# Altium PCB Smart_Ruler_PCB.PcbDoc
Units mil, origin at the board's own origin, x right, y up, seen from the top; angles counter-clockwise.
Board outline 6135.02 x 984.25 mil, 2 copper layers (Top Layer, Bottom Layer); 17 components, 24 nets, 192 pads, 0 vias.
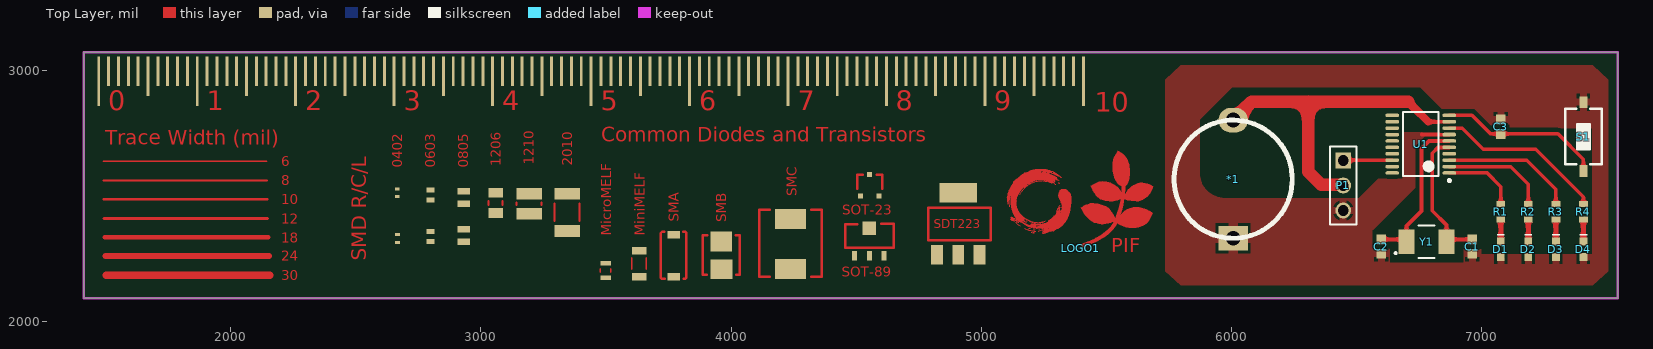
[diagram p0: Top Layer view]
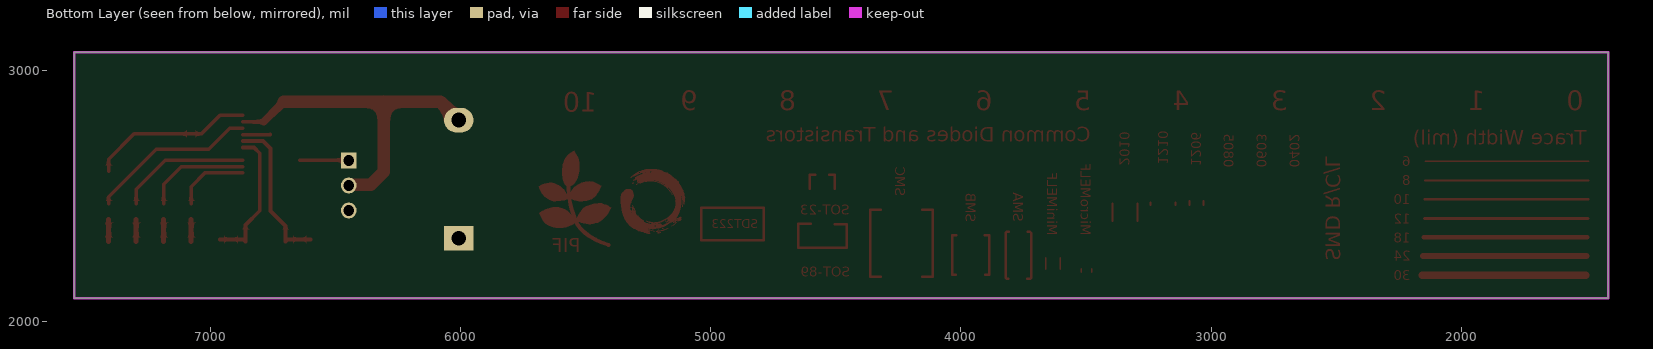
[diagram p1: Bottom Layer view, seen from below]
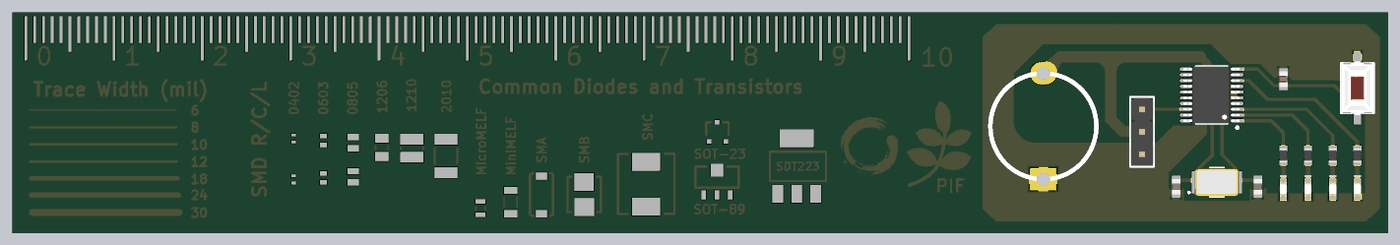
[diagram p2: 3D render of the assembled board from above, using the file's embedded part models]

## Layer stack, top to bottom
Top Solder: solder mask 0.4, Solder Resist, Dk 3.5
Top Layer: signal copper 1.4
Dielectric 1: dielectric 12.6, FR-4, Dk 4.8
Bottom Layer: signal copper 1.4
Bottom Solder: solder mask 0.4, Solder Resist, Dk 3.5

## Board outline
1410.98,2090.75 1410.98,3075 7546,3075 7546,2090.75

## Design rules (kind name [scope] priority, off if disabled: settings)
Clearance [All] p1: gap=10 ignorepadtopadclearanceinfootprint=FALSE
PolygonConnect PolygonConnect_6 [All vs IsNamedPolygon('GND_L01_P000')] p1: thpad.connectstyle=Relief thpad.reliefconductorwidth=30 thpad.reliefentries=4 thpad.polygonreliefangle="90 Angle" thpad.airgapwidth=10 smdpad.connectstyle=Relief smdpad.reliefconductorwidth=30 smdpad.reliefentries=4 smdpad.polygonreliefangle="90 Angle" smdpad.airgapwidth=10 via.connectstyle=Relief via.reliefconductorwidth=10 via.reliefentries=4 via.polygonreliefangle="90 Angle" via.airgapwidth=10
PolygonConnect PolygonConnect_5 [All vs IsNamedPolygon('NONET_L01_P000')] p2: thpad.connectstyle=Relief thpad.reliefconductorwidth=25 thpad.reliefentries=4 thpad.polygonreliefangle="90 Angle" thpad.airgapwidth=10 smdpad.connectstyle=Relief smdpad.reliefconductorwidth=25 smdpad.reliefentries=4 smdpad.polygonreliefangle="90 Angle" smdpad.airgapwidth=10 via.connectstyle=Relief via.reliefconductorwidth=10 via.reliefentries=4 via.polygonreliefangle="90 Angle" via.airgapwidth=10
PolygonConnect PolygonConnect_4 [All vs IsNamedPolygon('NONET_L01_P000')] p3: thpad.connectstyle=Relief thpad.reliefconductorwidth=25 thpad.reliefentries=4 thpad.polygonreliefangle="90 Angle" thpad.airgapwidth=10 smdpad.connectstyle=Relief smdpad.reliefconductorwidth=25 smdpad.reliefentries=4 smdpad.polygonreliefangle="90 Angle" smdpad.airgapwidth=10 via.connectstyle=Relief via.reliefconductorwidth=10 via.reliefentries=4 via.polygonreliefangle="90 Angle" via.airgapwidth=10
PolygonConnect PolygonConnect_3 [All vs IsNamedPolygon('NONET_L01_P000')] p4: thpad.connectstyle=Relief thpad.reliefconductorwidth=20 thpad.reliefentries=4 thpad.polygonreliefangle="90 Angle" thpad.airgapwidth=10 smdpad.connectstyle=Relief smdpad.reliefconductorwidth=20 smdpad.reliefentries=4 smdpad.polygonreliefangle="90 Angle" smdpad.airgapwidth=10 via.connectstyle=Relief via.reliefconductorwidth=10 via.reliefentries=4 via.polygonreliefangle="90 Angle" via.airgapwidth=10
PolygonConnect PolygonConnect_2 [All vs IsNamedPolygon('NONET_L01_P000')] p5: thpad.connectstyle=Relief thpad.reliefconductorwidth=30 thpad.reliefentries=4 thpad.polygonreliefangle="90 Angle" thpad.airgapwidth=10 smdpad.connectstyle=Relief smdpad.reliefconductorwidth=30 smdpad.reliefentries=4 smdpad.polygonreliefangle="90 Angle" smdpad.airgapwidth=10 via.connectstyle=Relief via.reliefconductorwidth=10 via.reliefentries=4 via.polygonreliefangle="90 Angle" via.airgapwidth=10
PolygonConnect PolygonConnect_1 [All vs IsNamedPolygon('NONET_L01_P000')] p6: thpad.connectstyle=Relief thpad.reliefconductorwidth=30 thpad.reliefentries=4 thpad.polygonreliefangle="90 Angle" thpad.airgapwidth=10 smdpad.connectstyle=Relief smdpad.reliefconductorwidth=10 smdpad.reliefentries=4 smdpad.polygonreliefangle="90 Angle" smdpad.airgapwidth=10 via.connectstyle=Relief via.reliefconductorwidth=10 via.reliefentries=4 via.polygonreliefangle="90 Angle" via.airgapwidth=10
PolygonConnect [All] p7: connectstyle=Relief reliefconductorwidth=10 reliefentries=4 polygonreliefangle="90 Angle" airgapwidth=10
RoutingVias [All] p1: holewidth=28 width=50 viastyle="Through Hole" minholewidth=28 minwidth=50 maxholewidth=28 maxwidth=50
SolderMaskExpansion [All] p1: expansion=4 istentingtop=FALSE
Width [All] p1: maxlimit=50 minlimit=10 preferedwidth=20 minimp=50.000000 maximp=50.000000 favimp=50.000000
30 further rules are at their usual default settings.

## Components (designator, comment, footprint, x,y, rotation, side; value= is the part's Value field where it differs from the comment)
*1 "CR1220_Bat Battery" "CR1220_Bat Battery" 6008,2567 r180 top
C1 "20pF" CAPC17595_87N_KEM_0603 6964,2297.65 r90 top
C2 "20pF" CAPC17595_87N_KEM_0603 6600,2297.65 r90 top
C3 "22pF" CAPC17595_87N_KEM_0603 7078,2777 r90 top
D1 "Color ? , 3.2V, 140°" WL-SMCW_0603_150060xx75003 7078,2287 r270 top
D2 "Color ? , 3.2V, 140°" WL-SMCW_0603_150060xx75003 7188,2287 r270 top
D3 "Color ? , 3.2V, 140°" WL-SMCW_0603_150060xx75003 7298,2287 r270 top
D4 "Color ? , 3.2V, 140°" WL-SMCW_0603_150060xx75003 7408,2287 r270 top
LOGO1 "LOGO PIF" "PIF LOGO BIG TOP" 5399,2291 r0 top
P1 "61300311121" 61300311121 6448,2542 r270 top
R1 "100Ω" "WRIS-PSMB_0603_L1.6W0.8H0.3 - duplicate" 7078,2437 r270 top
R2 "100Ω" "WRIS-PSMB_0603_L1.6W0.8H0.3 - duplicate" 7188,2437 r270 top
R3 "100Ω" "WRIS-PSMB_0603_L1.6W0.8H0.3 - duplicate" 7298,2437 r270 top
R4 "100Ω" "WRIS-PSMB_0603_L1.6W0.8H0.3 - duplicate" 7408,2437 r270 top
S1 "Tact SW - 2Pin" SW-SMD 7408,2737 r90 top
U1 "CH32V003F4P6" TSOP20_CH32V003 6758,2707 r180 top
Y1 "24MHz" WE-XTAL_CFPX-5032_2Pin 6781,2317 r0 top

## Footprints (in the part's own frame and the unit in brackets; to place one, negate y for a bottom-side part, rotate by r counter-clockwise, add the part's x,y. Pads: shape width x height; smd on the part's side, far side on the other; paste and mask are expansions set on the pad)
61300311121 [mm] "Pin Header, pitch 2.54 mm, THT, Vertical, single row, 3p"
  rect 1.6x1.6 hole 1.1: 1(-2.54,0)
  round 1.6 hole 1.1: 2(0,0) 3(2.54,0)
  silkscreen extent -3.96,-1.35 3.96,1.35, body extent -3.81,-1.27 3.81,1.27, height 8.57
CAPC17595_87N_KEM_0603 [mm]
  rect 1.006x0.95 smd paste+0 mask+0: 1(-0.728,0) 2(0.728,0)
  body extent -0.87,-0.48 0.87,0.48, height 0.87
"CR1220_Bat Battery" [mm]
  rect 3x2.5 hole 1.5: 1(0,6)
  oval 3x2.5 hole 1.5: 2(0,-6)
  silkscreen extent -6,-6 6,6
"PIF LOGO BIG TOP" [mil]
  Top Layer region: 103.01,266.37 103.07,266.34 103.14,266.35 112.3,263.85 112.31,263.84 112.33,263.84 118.99,261.74 119.04,261.71 119.1,261.7 126.2,257.97 126.27,257.89 132.43,254.63 132.45,254.61 132.48,254.6 144.58,246.67 144.65,246.58 144.74,246.53 156.41,231.53 156.42,231.49 156.45,231.47 164.35,218.57 164.35,218.56 164.35,218.56 166.85,214.4 166.88,214.18 166.93,213.97 164.87,200.2 164.83,200.15 164.84,200.08 164.74,199.98 164.69,199.85 164.64,199.83 164.61,199.78 164.55,199.77 164.51,199.72 147.84,191.82 147.77,191.82 147.71,191.77 128.94,187.61 128.88,187.62 128.82,187.59 114.25,187.16 114.2,187.18 114.14,187.17 96.64,189.67 96.6,189.69 96.55,189.69 85.29,193.02 85.26,193.04 85.22,193.04 78.15,195.98 78.1,196.03 78.02,196.05 73.02,199.79 73.01,199.79 73,199.8 65.07,206.06 65.05,206.11 65,206.13 58.77,212.8 58.74,212.87 58.68,212.91 48.25,230.81 48.24,230.84 48.22,230.86 43.22,241.29 43.22,241.31 43.21,241.32 40.31,248.39 40.31,248.58 40.27,248.76 40.31,248.82 40.31,248.88 40.44,249.01 40.55,249.17 51.38,256.27 51.42,256.28 51.44,256.3 63.51,262.54 63.56,262.54 63.6,262.57 71.1,265.07 71.11,265.07 71.12,265.08 76.96,266.75 77.01,266.74 77.06,266.77 84.56,267.6 84.62,267.59 84.68,267.61
  Top Layer region: 147.8,389.42 148.04,389.41 155.11,386.08 155.14,386.05 155.18,386.04 161.01,382.27 161.04,382.23 161.09,382.21 169.03,375.14 169.03,375.14 169.04,375.13 175.27,369.3 175.29,369.25 175.35,369.22 181.61,360.88 181.61,360.88 181.62,360.88 184.95,356.28 184.97,356.21 185.02,356.16 187.92,349.49 187.92,349.48 187.92,349.48 190.02,344.48 190.02,344.42 190.06,344.37 192.56,333.14 192.56,333.14 192.56,333.13 194.23,325.2 194.22,325.18 194.23,325.16 195.47,316.42 195.46,316.38 195.47,316.33 195.47,307.17 195.47,307.15 195.47,307.13 194.64,294.19 194.64,294.19 194.64,294.18 193.81,283.35 193.79,283.32 193.8,283.29 192.96,278.29 192.96,278.29 192.96,278.28 191.3,269.55 191.28,269.52 191.28,269.48 190.25,266.05 190.22,266.02 190.22,265.98 187.42,259.58 187.37,259.53 187.36,259.47 183.76,254.27 183.73,254.25 183.72,254.21 178.12,247.81 178.05,247.78 178.02,247.72 176.68,246.72 176.74,243.41 176.7,243.32 176.72,243.23 176.62,243.1 176.56,242.96 176.47,242.92 176.41,242.84 176.26,242.82 176.11,242.76 176.02,242.8 175.93,242.78 165.49,245.72 165.42,245.77 165.33,245.79 159.93,249.12 159.91,249.15 159.87,249.16 150.27,256.66 150.23,256.73 150.16,256.78 141.83,267.61 141.81,267.66 141.77,267.69 138.04,274.35 138.04,274.4 138,274.44 134.23,284.44 131.34,291.94 131.34,291.98 131.31,292.01 129.21,300.34 129.21,300.34 129.21,300.35 127.15,308.68 127.15,308.74 127.13,308.8 126.69,316.3 126.7,316.32 126.69,316.33 126.69,332.17 126.7,332.19 126.7,332.22 127.53,341.79 127.53,341.8 127.53,341.8 128.8,353.07 128.84,353.14 128.83,353.22 131.73,361.12 131.74,361.13 131.74,361.13 134.67,368.63 134.71,368.68 134.72,368.73 140.55,378.33 140.57,378.34 140.57,378.36 145.11,384.99 147.19,389.12 147.37,389.28 147.55,389.44 147.56,389.44 147.57,389.44
  Top Layer region: 51.34,179.76 51.38,179.77 68.45,178.51 68.51,178.48 68.57,178.48 81.91,174.75 81.94,174.72 81.98,174.72 99.91,167.22 99.94,167.19 99.98,167.19 108.72,162.19 108.76,162.13 108.83,162.1 113.83,157.5 113.86,157.44 113.92,157.41 118.09,151.57 118.09,151.56 118.1,151.56 123.1,144.06 123.1,144.05 123.1,144.05 131.44,131.15 131.44,131.11 131.47,131.09 133.97,126.09 136.91,120.25 136.92,120.1 136.97,119.97 136.97,118.3 136.93,118.19 136.93,118.06 132.03,105.73 131.99,105.69 131.98,105.63 131.92,105.59 131.89,105.51 131.77,105.47 131.69,105.38 131.63,105.38 131.58,105.34 124,103.52 118.59,101.85 118.56,101.86 118.53,101.84 110.63,100.17 110.63,100.17 110.62,100.17 99.79,98.07 99.78,98.07 99.78,98.07 90.18,96.4 90.12,96.41 90.07,96.39 80.9,96.39 80.87,96.4 80.84,96.4 71.68,97.23 71.63,97.25 71.59,97.24 64.52,98.91 64.5,98.92 64.49,98.92 54.49,101.85 54.43,101.9 54.36,101.91 43.09,108.14 43.08,108.16 43.05,108.16 37.22,111.93 37.18,111.99 37.11,112.02 25.44,124.09 25.44,124.09 25.43,124.09 18.37,131.59 18.36,131.61 18.34,131.62 13.74,137.05 13.72,137.12 13.67,137.16 10.34,143.39 3.68,155.05 3.68,155.06 3.67,155.07 0.33,161.33 0.31,161.55 0.27,161.75 0.29,161.78 0.29,161.82 0.42,161.99 0.54,162.16 12.21,170.06 12.27,170.08 12.31,170.12 19.81,173.45 19.85,173.45 19.88,173.48 29.48,176.41 29.49,176.41 29.49,176.42 38.22,178.92 38.29,178.91 38.36,178.94 51.29,179.77
  Top Layer region: 247.66,262.28 247.74,262.3 257.74,260.63 257.76,260.62 257.78,260.62 266.94,258.52 266.99,258.49 267.06,258.49 273.72,255.59 273.72,255.59 273.72,255.59 280.39,252.65 280.44,252.61 280.5,252.59 288.83,246.76 288.94,246.59 289.07,246.44 289.07,246.39 289.1,246.34 289.05,246.15 289.04,245.95 287.38,242.64 284.89,236.43 284.88,236.41 284.87,236.38 281.14,228.88 281.14,228.88 281.14,228.88 276.54,219.71 276.49,219.67 276.47,219.6 271.47,213.33 271.46,213.33 271.45,213.32 266.45,207.48 266.39,207.45 266.35,207.38 258.45,201.55 258.43,201.55 258.41,201.53 246.75,194.03 246.68,194.02 246.62,193.97 236.62,190.23 236.6,190.23 236.59,190.22 231.15,188.55 231.08,188.56 231.02,188.53 220.62,187.7 220.56,187.71 220.5,187.7 200.9,189.76 200.89,189.77 200.87,189.77 192.14,191.03 192.11,191.05 192.07,191.05 185.8,192.71 185.79,192.73 185.76,192.73 180.76,194.39 180.71,194.44 180.64,194.45 173.57,198.62 173.52,198.68 173.45,198.71 173.43,198.76 173.38,198.79 173.35,198.91 173.28,199.01 173.29,199.09 173.26,199.17 173.28,199.22 173.27,199.27 175.33,212.17 175.39,212.26 175.4,212.36 182.5,226.13 182.53,226.15 182.53,226.19 187.53,233.69 187.59,233.73 187.61,233.79 194.61,240.79 194.65,240.8 194.66,240.83 203.5,248 203.52,248.01 203.54,248.03 204.53,248.7 204.54,248.7 204.55,248.71 206.58,249.95 206.6,249.95 206.61,249.97 208.7,251.11 208.71,251.11 208.72,251.12 210.86,252.17 210.88,252.17 210.89,252.18 211.97,252.65 219.03,255.98 219.04,255.98 219.06,255.99 228.22,259.76 228.28,259.76 228.34,259.79 236.27,261.46 236.31,261.45 236.35,261.47 247.59,262.31
  Top Layer region: 225.34,164.82 225.4,164.84 233.33,164 233.38,163.98 233.44,163.98 240.93,161.92 255.92,158.15 255.96,158.13 256.01,158.13 261.01,156.06 261.03,156.04 261.06,156.03 272.3,150.2 272.32,150.17 272.36,150.17 282.36,143.5 282.37,143.47 282.4,143.47 286.57,140.13 286.64,140 286.75,139.89 286.75,139.79 286.8,139.7 286.76,139.56 286.76,139.4 283.86,131.9 283.84,131.87 283.83,131.84 279.23,123.07 279.23,123.07 279.23,123.06 275.9,116.83 275.87,116.81 275.86,116.77 267.12,104.27 267.08,104.23 267.05,104.18 261.22,98.35 261.16,98.32 261.13,98.27 254.46,93.67 254.42,93.66 254.39,93.63 247.72,90.29 247.71,90.29 247.71,90.29 238.11,85.72 238.09,85.72 238.09,85.71 232.25,83.21 232.17,83.21 232.11,83.17 222.11,81.5 222.06,81.51 222.02,81.49 207.02,81.06 206.99,81.07 206.97,81.06 191.13,81.89 191.09,81.92 191.04,81.91 178.97,84.41 178.95,84.42 178.92,84.42 168.92,87.35 168.88,87.38 168.83,87.38 158.83,91.95 158.81,91.98 158.77,91.99 151.27,96.59 151.24,96.62 151.21,96.63 145.78,100.79 145.76,100.83 145.71,100.85 145.68,100.94 145.6,101.01 145.59,101.12 145.53,101.22 145.54,101.26 145.53,101.3 145.56,101.39 145.56,101.49 153.49,126.49 153.63,126.66 153.74,126.83 156.17,128.45 165.28,139.21 169.44,144.21 169.49,144.24 169.51,144.28 175.75,149.68 175.79,149.7 175.82,149.74 186.26,156.41 186.3,156.41 186.32,156.44 195.06,160.61 195.14,160.62 195.21,160.66 210.21,163.6 210.25,163.59 210.28,163.6 225.28,164.84
  Top Layer lines w15.75: 11.17,13.57 40.2,23.9 62.5,34.07 95,54.07 106.67,63.63 122.07,78.23 129.17,87.4 137.07,99.07 144.17,116.13 156.67,151.57 157.9,156.97 161.67,173.63 165.4,190.73 167.67,200.73 168.5,211.17 169.33,221.57 169.77,230.73 171,264.83
SW-SMD [mm] "Switch SMD type"
  rect 1.2x0.8 smd: 1(-3.5,0) 2(3.5,0)
  silkscreen extent -2.82,-1.85 2.82,1.85, body extent -3.05,-1.85 3.05,1.85, height 2.5
TSOP20_CH32V003 [mm] "TSOP, 20-Leads, Body 6.45x4.35mm, Pitch 0.65mm, IPC Medium Density"
  oval 1.4x0.356 smd: 1(-2.9,2.925) 2(-2.9,2.275) 3(-2.9,1.625) 4(-2.9,0.975) 5(-2.9,0.325) 6(-2.9,-0.325) 8(-2.9,-1.625) 9(-2.9,-2.275) 10(-2.9,-2.925) 11(2.9,-2.925) 12(2.9,-2.275) 13(2.9,-1.625) 14(2.9,-0.975) 15(2.9,-0.325) 16(2.9,0.325) 17(2.9,0.975) 18(2.9,1.625) 19(2.9,2.275) 20(2.9,2.925)
  oval 1.4x0.381 smd: 7(-2.9,-0.975)
  silkscreen extent -3.03,-3.25 1.8,3.82, body extent -3.18,-3.25 3.18,3.25, height 1.1
WE-XTAL_CFPX-5032_2Pin [mm] "Quartz Crystal, size CFPX-104, body 5x3.2mm"
  rect 1.6x2.5 smd: 1(-2.032,0) 3(2.032,0)
  silkscreen extent -3.24,-1.65 0.8,1.65, body extent -2.5,-1.6 2.5,1.6, height 0.95
WL-SMCW_0603_150060xx75003 [mm] "SMD Mono-color Chip LED, body 1.6x0.8mm"
  rect 0.8x0.8 smd: 1(-0.8,0) 2(0.8,0)
  silkscreen extent -1.55,-0.4 -1.4,0.4, body extent -0.8,-0.4 0.8,0.4, height 0.7
"WRIS-PSMB_0603_L1.6W0.8H0.3 - duplicate" [mm] "Metal Plate Resistor, SMT, body size 1.6x0.8mm"
  rect 0.6x0.9 smd: 1(-0.8,0) 2(0.8,0)
  body extent -0.8,-0.4 0.8,0.4, height 0.3

## Part data
C1 C2 C3: library part Capacitor_SMD, "No Description Available", Manufacturer_Part_Number=C1206C104K5RACTU, Mfr_Name=Kemet, Copyright="Copyright (C) 2023 Ultra Librarian. All rights reserved.", RefDes=RefDes, Type=DEV
D1 D2 D3 D4: library part LED_smd, "WL-SMCW Mono-color Chip LED Waterclear, size ?, color ?, 3.2V, 140°", Case/Size Code=0603, Emitting Color=Blue, Forward Voltage=3.2V, Manufacturer="Wurth Elektronik", Manufacturer Part Number=150060BS75003, Operating Temperature Max=100°C, Operating Temperature Min=-40°C, Category="Signal LEDs", Chip Technology=InGaN, ComponentLink1Description="Website Link", ComponentLink1URL=https://www.we-online.com/redexpert/article/150060BS75003?ad, ComponentLink2Description="Datasheet Link", ComponentLink2URL=https://www.we-online.com/redexpert/spec/150060BS75003?ad, Dominant Wavelength=470nm, Height=0.7mm, Length=1.6mm, Luminous Intensity=350mcd, Match Code=WL-SMCW, Mount="Surface Mount", Packaging="Tape and Reel", Peak Wavelength=465nm, Viewing Angle=140°, Width=0.8mm
P1: "WR-PHD Pin Header, THT, pitch 2.54mm, Single Row, Vertical, 3p", Contact Resistance=20mOhm, Manufacturer="Wurth Elektronik", Operating Temperature="-40 to +105degC", Rated Current=3A, Withstanding Voltage=500VAC, Working Voltage=250VAC, ComponentLink1Description=Manufacturer, ComponentLink1URL=http://www.we-online.de, ComponentLink2Description=Datasheet, ComponentLink2URL=https://www.we-online.com/catalog/datasheet/61300311121.pdf, Gender="Pin Header", Manufacturer Part Number=61300311121, Mounting Technology=THT, Orientation=Vertical, Packaging=Bag, Pin Number=3, Pitch=2.54mm, Published Date="May 2020", Row Number=Single
R1 R2 R3 R4: library part Resistor_SMD, "WRIS-PSMC Metal Plate Resistor, SMT, size 2512, 2W, 5mΩ, +/-1%", Case/Size Code=2512, Manufacturer="Wurth Elektronik", Manufacturer Part Number=580070763005, Operating Temperature Max=155°C, Operating Temperature Min=-55°C, Rated Current=20A, Rated Power=2W, Resistance=5mΩ, Resistance Tolerance=+/-1%, Temperature Coefficient of Resistance=+/-100ppm/°C, Category="Metal Plate Resistors", ComponentLink1Description="Website Link", ComponentLink1URL=https://www.we-online.com/redexpert/article/580070763005?ad, ComponentLink2Description="Datasheet Link", ComponentLink2URL=https://www.we-online.com/redexpert/spec/580070763005?ad, Height=0.51mm, Length=6.3mm, Match Code=WRIS-PSMC, Mount="Surface Mount", Packaging="Tape and Reel", Technical Reference=MC2512R005F201KAATE0000, Width=3.1mm
S1: "Switch button 2 pin"
U1: "CH32V003 series is based on QingKe RISC-V2A core design of industrial-grade general-purpose microcontroller, support 48MHz system main frequency, with wide voltage, 1-wire serial debug interface, low-power consumption, ultra-small package, etc. CH32V003 series built-in a group of DMA controller, a group of 10-bit ADC, a group of op-amp comparators, multiple timers and standard communication interfaces USART, I2C, SPI, etc.", Built-in voltage regulator="1.5V power supply required by the core", Manufaccture=WCH, Operating voltage="2.7V to 5.5V", ComponentLink1Description=Datasheet, ComponentLink1URL=http://www.wch-ic.com/downloads/CH32V003DS0_PDF.html, ComponentLink2Description="Reference Manual", ComponentLink2URL=http://www.wch-ic.com/downloads/CH32V003RM_PDF.html, ComponentLink3Description="Evaluation board manual and reference routines", ComponentLink3URL=http://www.wch.cn/downloads/CH32V003EVT_ZIP.html, ComponentLink4Description=IDE, ComponentLink4URL=http://www.wch-ic.com/products/www.mounriver.com/, FLASH="16KB program Flash memory (CodeFlash) for storing user applications", HSE=4~25MHz, HSI="8MHz, 16MHz, 24MHz, 48MHz", LSI=128kHz, SRAM="2KB, starting address 0x20000000, supports byte, half-word,(2 bytes), and full-word (4bytes) access", System memory="1920B (bootloader) for storing the system bootloader (factory-cured bootloader)", User-selected word storage=64B, Vendor configuration word storage, factory-cured and unmodifiable by users=64B
Y1: library part XTAL_SMD, "WE-XTAL Quartz Crystal, SMT, CFPX-104, 24MHz, +/-50ppm", Frequency Stability=+/-50ppm, Load Capacitance=18pF, Manufacturer="Wurth Elektronik", Manufacturer Part Number=830032817, Operating Temperature="-10 to +60degC", ComponentLink1Description=Manufacturer, ComponentLink1URL=http://www.we-online.de, ComponentLink2Description=Datasheet, ComponentLink2URL=https://katalog.we-online.com/pbs/datasheet/830032817.pdf, Frequency=24MHz, Frequency Tolerance=+/-50ppm, Mounting Technology=SMT, Packaging="Tape and Reel", Published Date="July 2020", Size=CFPX-104

## Free pads (board coordinates)
  rect 11.81x196.85 smd: 0(1472,2959) 10(1865.7,2959) 10(1865.7,2959) 20(2259.4,2959) 30(2653.1,2959) 40(3046.8,2959) 50(3440.5,2959) 60(3834.2,2959) 70(4227.91,2959) 80(4621.61,2959) 90(5015.31,2959) 100(5409.01,2959)
  rect 11.81x118.11 smd: 1(1511.37,2998.37) 2(1550.74,2998.37) 3(1590.11,2998.37) 4(1629.48,2998.37) 6(1708.22,2998.37) 7(1747.59,2998.37) 8(1786.96,2998.37) 9(1826.33,2998.37) 11(1905.07,2998.37) 12(1944.44,2998.37) 13(1983.81,2998.37) 14(2023.18,2998.37) 16(2101.92,2998.37) 17(2141.29,2998.37) 18(2180.66,2998.37) 19(2220.03,2998.37) 21(2298.77,2998.37) 22(2338.14,2998.37) 23(2377.51,2998.37) 24(2416.88,2998.37) 26(2495.62,2998.37) 27(2534.99,2998.37) 28(2574.36,2998.37) 29(2613.73,2998.37) 31(2692.47,2998.37) 32(2731.84,2998.37) 33(2771.21,2998.37) 34(2810.58,2998.37) 36(2889.32,2998.37) 37(2928.69,2998.37) 38(2968.06,2998.37) 39(3007.43,2998.37) 41(3086.17,2998.37) 42(3125.54,2998.37) 43(3164.91,2998.37) 44(3204.28,2998.37) 46(3283.02,2998.37) 47(3322.39,2998.37) 48(3361.76,2998.37) 49(3401.13,2998.37) 51(3479.87,2998.37) 52(3519.24,2998.37) 53(3558.61,2998.37) 54(3597.98,2998.37) 56(3676.72,2998.37) 57(3716.09,2998.37) 58(3755.46,2998.37) 59(3794.83,2998.37) 61(3873.57,2998.37) 62(3912.94,2998.37) 63(3952.32,2998.37) 64(3991.68,2998.37) 66(4070.43,2998.37) 67(4109.8,2998.37) 68(4149.17,2998.37) 69(4188.54,2998.37) 71(4267.28,2998.37) 72(4306.65,2998.37) 73(4346.02,2998.37) 74(4385.39,2998.37) 76(4464.13,2998.37) 77(4503.5,2998.37) 78(4542.87,2998.37) 79(4582.24,2998.37) 81(4660.98,2998.37) 82(4700.35,2998.37) 83(4739.72,2998.37) 84(4779.09,2998.37) 86(4857.83,2998.37) 87(4897.2,2998.37) 88(4936.57,2998.37) 89(4975.94,2998.37) 91(5054.68,2998.37) 92(5094.05,2998.37) 93(5133.42,2998.37) 94(5172.79,2998.37) 96(5251.53,2998.37) 97(5290.9,2998.37) 98(5330.27,2998.37) 99(5369.64,2998.37)
  rect 11.81x157.48 smd: 5(1668.85,2978.69) 15(2062.55,2978.69) 25(2456.25,2978.69) 35(2849.95,2978.69) 45(3243.65,2978.69) 55(3637.35,2978.69) 65(4031.06,2978.69) 75(4424.76,2978.69) 85(4818.46,2978.69) 95(5212.16,2978.69)
  rect 19.68x11.81 smd: 151(2665.5,2528.53) 151(2666,2345.5) 152(2665.5,2497.03) 152(2666,2314)
  rect 31.5x19.68 smd: 151(2798.22,2317.46) 151(2798.22,2357.65) 151(2798.22,2483.96) 151(2798.22,2524.16)
  rect 51.18x27.56 smd: 151(2931,2317) 151(2931,2367) 151(2931,2469) 151(2931,2519)
  rect 59.06x39.37 smd: 151(3059,2432) 151(3059,2513)
  rect 102.36x47.24 smd: 151(3193,2429) 151(3193,2509) 151(3345,2360) 151(3345,2509)
  rect 43.31x19.68 smd: 151(3499,2173) 151(3499,2231)
  rect 59.06x31.5 smd: 151(3633,2177) 151(3633,2281)
  rect 49.21x31.5 smd: 151(3771,2177) 151(3771,2345)
  rect 86.61x78.74 smd: 151(3961,2318) 151(3962,2207)
  rect 124.02x78.74 smd: 151(4237,2208) 151(4237,2408)
  rect 19.68x19.68 smd: 151(4517,2499) 152(4554,2586) 152(4591.8,2499)
  rect 19.68x39.37 smd: 152(4493.94,2261) 153(4553,2261) 154(4612.06,2261)
  rect 47.24x78.74 smd: 152(4824,2265) 153(4908.65,2265) 154(4993.29,2265)
  rect 55.12x55.12 smd: 154(4553,2371.24)
  rect 149.61x78.74 smd: 154(4908.65,2513.03)

## Nets (pads, with @x,y where several pads share a name; then routed paths per layer and width w, separated by ;. In a path a pad name is that pad's centre, name@x,y a point inside that pad or via, vN(x,y) a via of type N, cw(c..) or ccw(c..) an arc to the next point about the centre after c; other vN are vias at no path point)
3V_MCU: *1.2 P1.2 U1.9 | length 1370.8
  Top Layer w14: 6788.43,2796.57 U1.9
  Top Layer w30: 6708,2877 6788.43,2796.57
  Top Layer w50: *1.2 6081.78,2877 6308,2877 ; P1.2 6445.51,2544.49 6360.51,2544.49 6308,2597 6308,2877 ; 6708,2877 6308,2877
GND: *1.1 C1.1 C2.1 C3.2 D1.2 D2.2 D3.2 D4.2 P1.3 S1.2 U1.7 | length 110.4
  Top Layer w14: 6762,2746 6762.61,2745.39 U1.7
NetD1_1: D1.1 R1.2 | length 87
  Top Layer w20: D1.1 R1.2
NetD2_1: D2.1 R2.2 | length 87
  Top Layer w20: D2.1 R2.2
NetD3_1: D3.1 R3.2 | length 87
  Top Layer w20: D3.1 R3.2
NetD4_1: D4.1 R4.2 | length 87
  Top Layer w20: D4.1 R4.2
OSC_IN: C1.2 U1.5 Y1.3 | length 562.3
  Top Layer w15: U1.5 6827.2,2694.2 6804,2671 6804,2441 6861,2384 Y1.3 6870.31,2326.31 C1.2
OSC_OUT: C2.2 U1.6 Y1.1 | length 626.2
  Top Layer w15: C2.2 6691.69,2326.31 Y1.1 6701,2380 6761,2440 6761,2690 6790.8,2719.8 U1.6
PC0: C3.1 S1.1 U1.10 | length 656.2
  Top Layer w14: U1.10 6962.84,2822.16 7036.65,2748.35 C3.1 7306.65,2748.35 7408,2647 S1.1
PC1: U1.11
PC2: U1.12
PC3: U1.13
PC4: U1.14
PC5: U1.15
PC6: U1.16
PC7: U1.17
PD0: R4.1 U1.8 | length 677.8
  Top Layer w14: U1.8 6924.02,2770.98 7008,2687 7218,2687 7408,2497 R4.1
PD2: U1.19
PD3: U1.20
PD4: R1.1 U1.1 | length 297
  Top Layer w14: U1.1 7023.16,2591.84 7078,2537 R1.1
PD5: R2.1 U1.2 | length 423.5
  Top Layer w14: U1.2 7117.57,2617.43 7188,2547 R2.1
PD6: R3.1 U1.3 | length 532.4
  Top Layer w14: U1.3 7181.98,2643.02 7298,2527 R3.1
PD7: U1.4
SWIO: P1.1 U1.18 | length 196.3
  Top Layer w10: P1.1 P1.1@6449.02,2643.02
  Top Layer w14: P1.1@6449.02,2643.02 U1.18
copper on no net: | length 7799.3
  Top Layer w6: 1489,2639 2143,2639 ; 3478,2194 3478,2209 ; 3520,2194 3520,2209 ; 3604,2207 3604,2252 ; 3662,2207 3662,2252
  Top Layer w8: 1490,2562.43 2144,2562.43 ; 3031,2464 3031,2479 ; 3087,2464 3087,2479 ; 3143,2464 3143,2474 ; 3243,2464 3243,2474 ; 3295,2400 3295,2470 ; 3395,2400 3395,2470
  Top Layer w10: 1491,2485.87 2145,2485.87 ; 3733,2357 3724.86,2357 3719,2351.14 3719,2173.86 3724.86,2168 3735,2168 ; 3809,2357.5 3816.14,2357.5 3822,2351.64 3822,2174.36 3816.14,2168.5 3811,2168.5 ; 3901,2342 3887,2342 ; 3903,2185 3887,2185 3887,2342 ; 3904,2342 3887,2342 ; 4018,2342 4035,2342 4035,2185 4021,2185 ; 4154,2444 4112,2444 4112,2176 4155,2176 ; 4320,2177 4363,2177 4363,2445 4321,2445 ; 4505,2387 4457,2387 4457,2293 4650,2293 4650,2388 4600,2388 ; 4505,2529 4505,2585 4526,2585 ; 4583,2585 4605,2585 4605,2529 ; 4788.8,2323.3 5038.8,2323.3 5038.8,2453.3 4788.8,2453.3 4788.8,2323.3
  Top Layer w12: 1492,2409.3 2146,2409.3
  Top Layer w18: 1495,2334.73 2149,2334.73
  Top Layer w24: 1498,2260.17 2152,2260.17
  Top Layer w30: 1501,2182.6 2155,2182.6

## Polygon pours and split planes (outlines as drawn)
GND on Top Layer "GND_L01_P000" (solid, remove dead copper, pour order 0): 5736.35,2142 5736.35,3022 7508,3022 7508,2142

## Keep-outs
Keep-Out Layer:
  the board outline again, w10

## Other copper
Top Layer:
  drawing of 73 lines, arcs and shapes, not listed
  text "0" at 1510,2842 h78.74
  text "1" at 1903.7,2842 h78.74
  text "2" at 2297.4,2842 h78.74
  text "3" at 2691.1,2842 h78.74
  text "4" at 3084.8,2842 h78.74
  text "5" at 3478.5,2842 h78.74
  text "6" at 3872.2,2842 h78.74
  text "7" at 4265.91,2842 h78.74
  text "8" at 4659.61,2842 h78.74
  text "9" at 5053.31,2842 h78.74
  text "10" at 5454,2837 h78.74
  text "Common Diodes and Transistors" at 3481,2716 h59.06
  text "Trace Width (mil)" at 1498,2704 h59.06
  text "1210" at 3210.93,2625.58 h39.37 r90
  text "2010" at 3366.13,2619.87 h39.37 r90
  text "6" at 2201,2619 h39.37
  text "1206" at 3079.73,2619.02 h39.37 r90
  text "0402" at 2686.13,2612.46 h39.37 r90
  text "0603" at 2817.33,2612.46 h39.37 r90
  text "0805" at 2948.53,2612.46 h39.37 r90
  text "8" at 2201,2543 h39.37
  text "SMC" at 4263.13,2497.87 h39.37 r90
  text "10" at 2201,2466 h39.37
  text "SOT-23" at 4444.87,2424.87 h39.37
  text "SMA" at 3791.13,2396.87 h39.37 r90
  text "SMB" at 3981.13,2395.87 h39.37 r90
  text "12" at 2201,2389 h39.37
  text "SDT223" at 4810.87,2371.87 h35
  text "MicroMELF" at 3521.13,2341.87 h39.37 r90
  text "MiniMELF" at 3654.13,2341.87 h39.37 r90
  text "18" at 2201,2313 h39.37
  text "24" at 2201,2241 h39.37
  text "SMD R/C/L" at 2542,2241 h59.06 r90
  text "SOT-89" at 4442.87,2177.87 h39.37
  text "30" at 2201,2162 h39.37

## Text inside footprints (layer, text, board x,y; h text height)
LOGO1: Top Layer "PIF" at 5520.67,2274 h56.25